# Altium PCB PCB1.PcbDoc
Units mil, origin at the board's own origin, x right, y up, seen from the top; angles counter-clockwise.
Board outline 3937.01 x 3937.01 mil, 2 copper layers (Top Layer, Bottom Layer); 122 components, 60 nets, 314 pads, 305 vias.
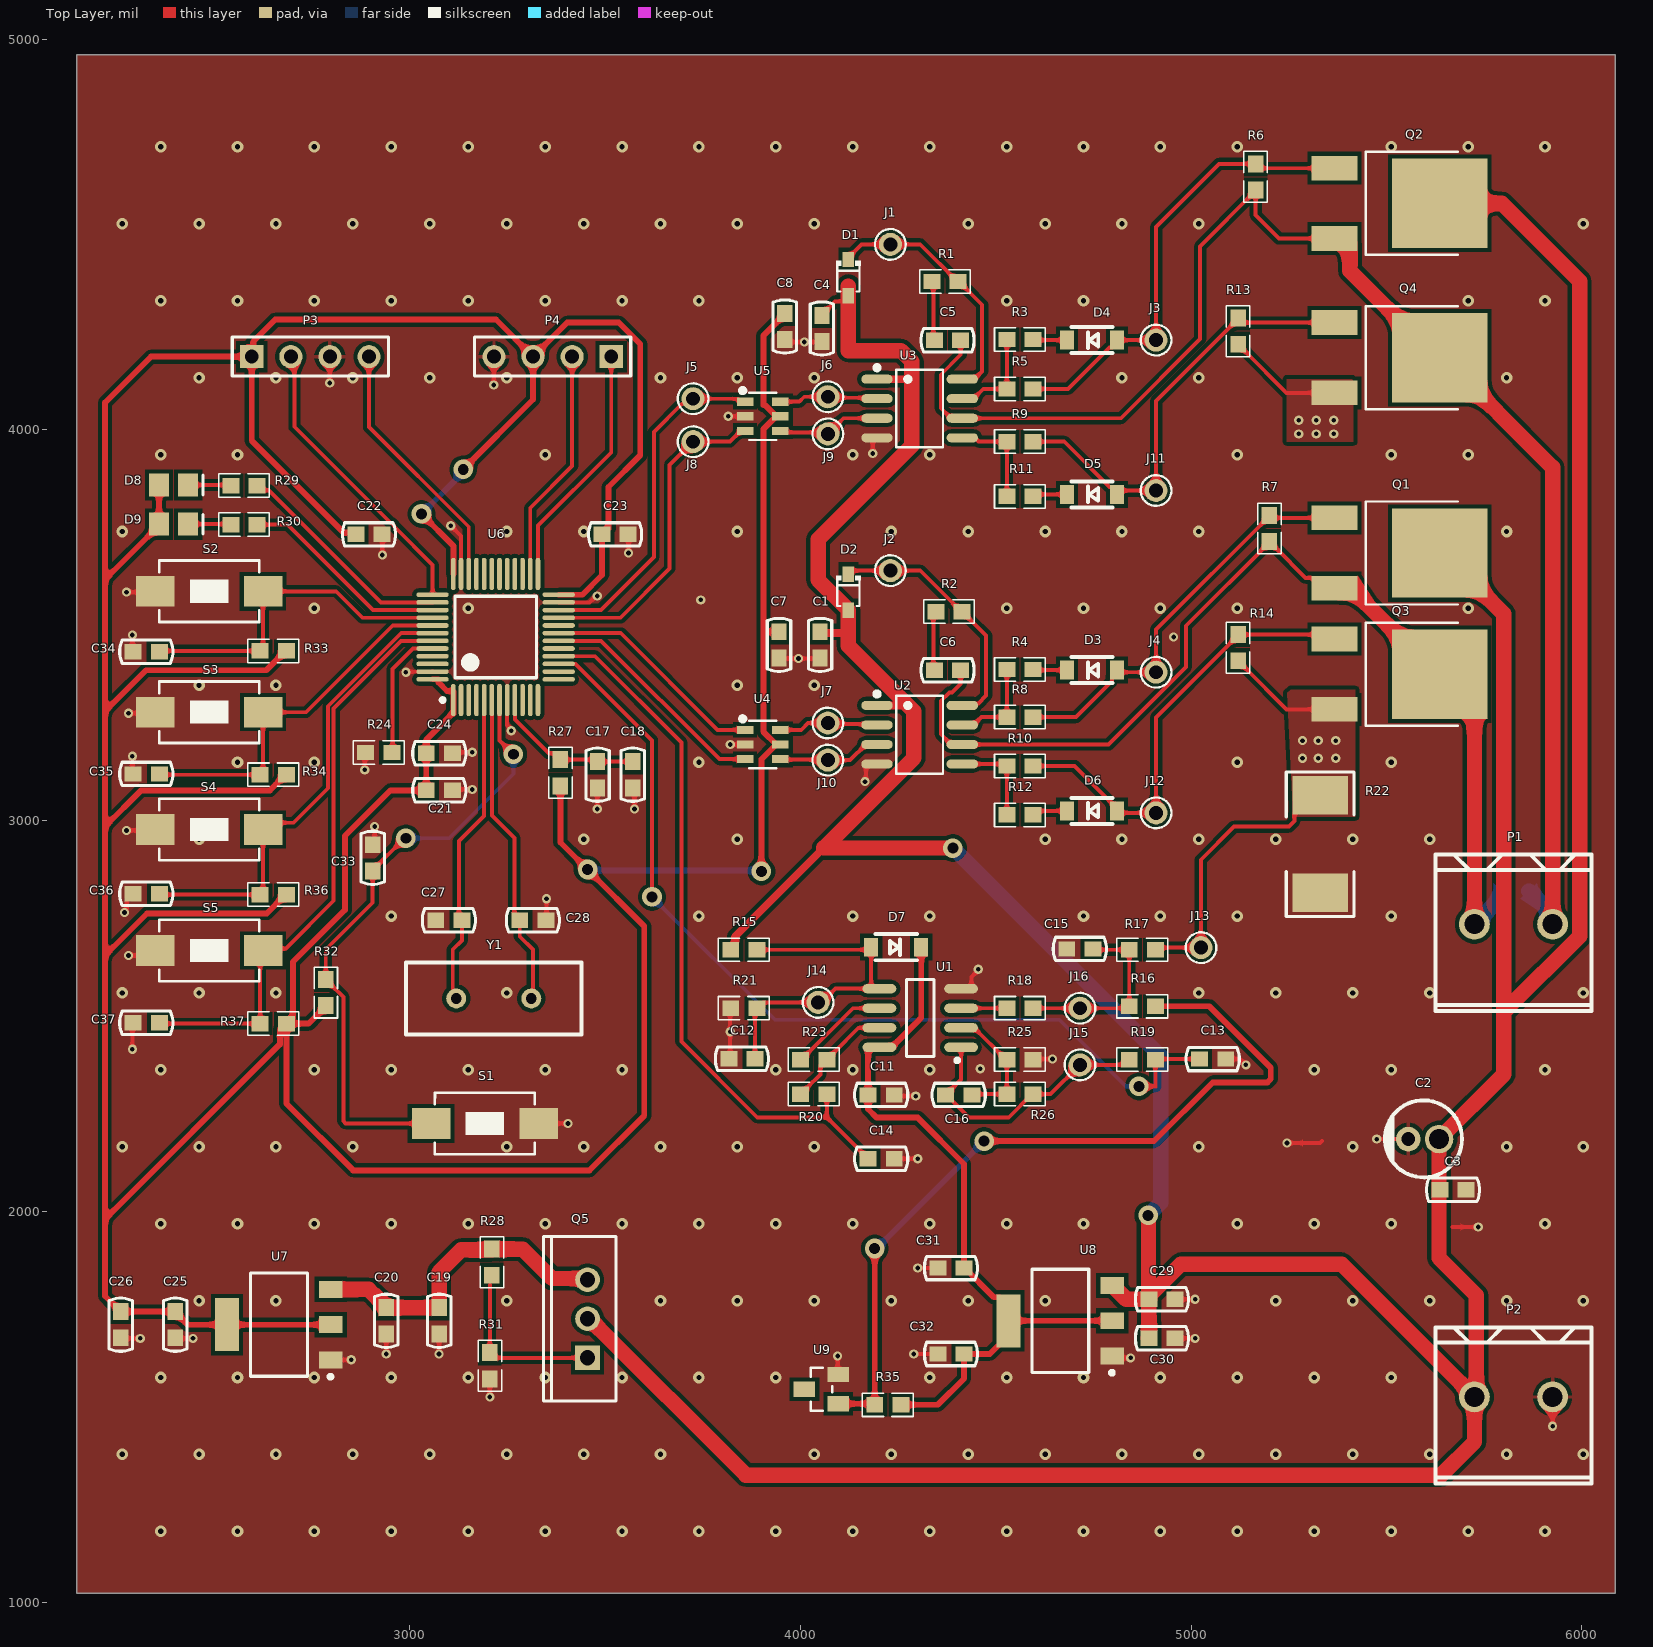
[diagram p0: Top Layer view]
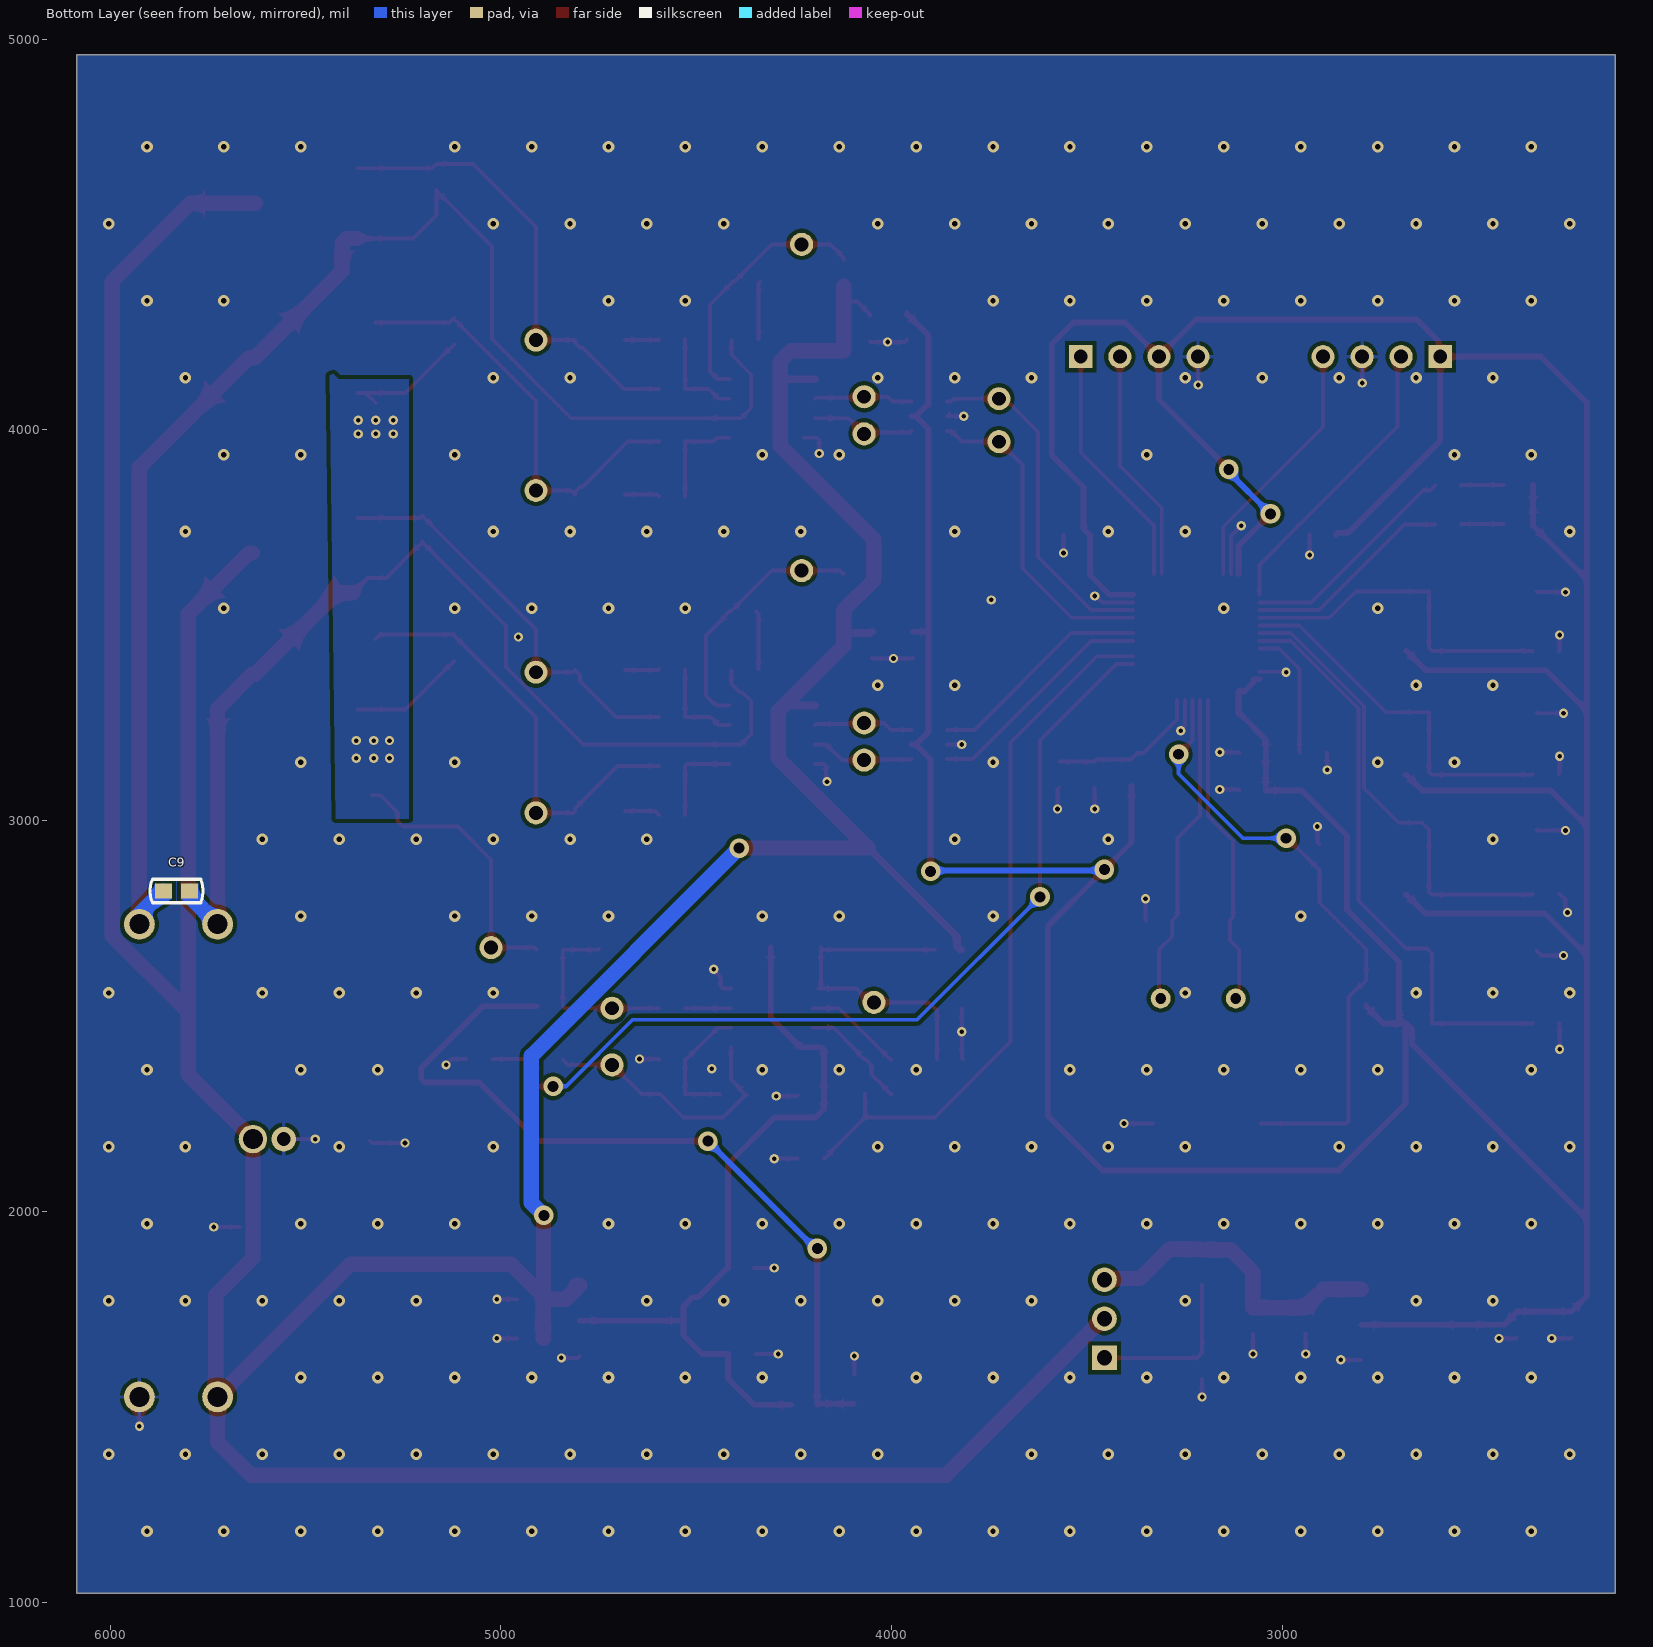
[diagram p1: Bottom Layer view, seen from below]

## Layer stack, top to bottom
Top Solder: solder mask 0.4, Solder Resist, Dk 3.5
Top Layer: signal copper 1.4
Dielectric 1: dielectric 12.6, FR-4, Dk 4.8
Bottom Layer: signal copper 1.4
Bottom Solder: solder mask 0.4, Solder Resist, Dk 3.5

## Board outline
2147.99,1022.99 2147.99,4960 6085,4960 6085,1022.99

## Design rules (kind name [scope] priority, off if disabled: settings)
Clearance [All] p1: gap=10 ignorepadtopadclearanceinfootprint=FALSE except(3.94: Arc-Arc Arc-Track Arc-SMDPad Track-Track Track-SMDPad SMDPad-SMDPad)
PolygonConnect [All] p1: thpad.connectstyle=Relief thpad.reliefconductorwidth=10 thpad.reliefentries=4 thpad.polygonreliefangle="90 Angle" thpad.airgapwidth=10 smdpad.connectstyle=Direct smdpad.reliefconductorwidth=10 smdpad.reliefentries=4 smdpad.polygonreliefangle="90 Angle" smdpad.airgapwidth=10 via.connectstyle=Direct via.reliefconductorwidth=10 via.reliefentries=4 via.polygonreliefangle="90 Angle" via.airgapwidth=10
RoutingVias [All] p1: holewidth=28 width=50 viastyle="Through Hole" minholewidth=11.81 minwidth=23.62 maxholewidth=28 maxwidth=50
SilkToSolderMaskClearance [IsPad] p1: minsilkscreentomaskgap=3.94 clearancetoexposedcopper=TRUE
SolderMaskExpansion [All] p1: expansion=4 istentingtop=FALSE
SupplyNets "Schematic Supply Nets_4" [InNet('VDD3.3V')] p1: voltage=0.000
SupplyNets "Schematic Supply Nets_3" [InNet('GND')] p2: voltage=0.000
SupplyNets "Schematic Supply Nets_2" [InNet('Vref 1.2V')] p3: voltage=0.000
SupplyNets "Schematic Supply Nets_1" [InNet('A3.3V')] p4: voltage=0.000
SupplyNets "Schematic Supply Nets" [InNet('12V')] p5: voltage=0.000
Width [All] p1: maxlimit=39.37 minlimit=10 preferedwidth=39.37
29 further rules are at their usual default settings.

## Components (designator, comment, footprint, x,y, rotation, side; value= is the part's Value field where it differs from the comment)
C1 "10uF" C-RAD-0603 4050,3450 r270 top
C2 "100uF" CAP-TH_BD5.0-P2.00-D0.5-FD-A 5595,2185 r180 top
C3 "100nF" C-RAD-0603 5670,2055 r180 top
C4 "10uF" C-RAD-0603 4055,4260 r270 top
C5 "100nF" C-RAD-0603 4376.54,4229.53 r180 top
C6 "100nF" C-RAD-0603 4376.54,3385 r180 top
C7 "100nF" C-RAD-0603 3945,3450 r270 top
C8 "100nF" C-RAD-0603 3960,4265 r270 top
C9 "100nF" C-RAD-0603 5830,2820 r0 bottom
C11 "100nF" C-RAD-0603 4206.54,2298.03 r0 top
C12 "100nF" C-RAD-0603 3850,2390.41 r180 top
C13 "1nF" C-RAD-0603 5055,2390 r0 top
C14 "1nF" C-RAD-0603 4206.54,2135 r0 top
C15 "1uF" C-RAD-0603 4715,2671.61 r0 top
C16 "100nF" C-RAD-0603 4405,2298.03 r0 top
C17 "10nF" C-RAD-0603 3480.61,3117.63 r90 top
C18 "1uF" C-RAD-0603 3570.61,3117.63 r90 top
C19 "10uF" C-RAD-0603 3075,1720 r90 top
C20 "100nF" C-RAD-0603 2940,1720 r90 top
C21 "100nF" C-RAD-0603 3075.61,3077.63 r180 top
C22 "100nF" C-RAD-0603 2895.61,3732.63 r180 top
C23 "100nF" C-RAD-0603 3525.61,3732.63 r180 top
C24 "10uF" C-RAD-0603 3075.61,3172.63 r180 top
C25 "10uF" C-RAD-0603 2400,1710 r90 top
C26 "100nF" C-RAD-0603 2260,1710 r90 top
C27 "16pF" C-RAD-0603 3100,2745 r0 top
C28 "16pF" C-RAD-0603 3315,2745 r180 top
C29 "10uF" C-RAD-0603 4925,1775 r180 top
C30 "100nF" C-RAD-0603 4925,1675 r180 top
C31 "10uF" C-RAD-0603 4385,1855 r0 top
C32 "100nF" C-RAD-0603 4385,1635 r0 top
C33 "100nF" C-RAD-0603 2905,2905 r270 top
C34 "100nF" C-RAD-0603 2325.61,3432.63 r0 top
C35 "100nF" C-RAD-0603 2325.61,3119.59 r0 top
C36 "100nF" C-RAD-0603 2325.61,2812.63 r0 top
C37 "100nF" C-RAD-0603 2325.61,2482.63 r0 top
D1 "1N4007WS" SOD-323_L1.8-W1.3-LS2.5-RD 4122.65,4390 r270 top
D2 "1N4007WS" SOD-323_L1.8-W1.3-LS2.5-RD 4122.65,3585 r270 top
D3 "1N5819W" SOD-123_L2.7-W1.6-LS3.7-R-RD 4746,3385.47 r0 top
D4 "1N5819W" SOD-123_L2.7-W1.6-LS3.7-R-RD 4746,4230 r0 top
D5 "1N5819W" SOD-123_L2.7-W1.6-LS3.7-R-RD 4746,3835 r0 top
D6 "1N5819W" SOD-123_L2.7-W1.6-LS3.7-R-RD 4746,3025 r0 top
D7 "1N4007" SOD-123_L2.7-W1.6-LS3.7-R-RD 4245,2676.14 r180 top
D8 "LED0" LED_0805 2395.61,3859.18 r0 top
D9 "LED0" LED_0805 2395.61,3759.18 r0 top
J1 "CHECK" CHECK-A 4230,4475 r0 top
J2 "CHECK" CHECK-A 4230,3640 r0 top
J3 "CHECK" CHECK-A 4910,4230 r0 top
J4 "CHECK" CHECK-A 4910,3380 r0 top
J5 "CHECK" CHECK-A 3725,4080 r0 top
J6 "CHECK" CHECK-A 4070,4085 r0 top
J7 "CHECK" CHECK-A 4070,3250 r0 top
J8 "CHECK" CHECK-A 3725,3970 r0 top
J9 "CHECK" CHECK-A 4070,3990 r0 top
J10 "CHECK" CHECK-A 4070,3155 r0 top
J11 "CHECK" CHECK-A 4910,3845 r0 top
J12 "CHECK" CHECK-A 4910,3020 r0 top
J13 "CHECK" CHECK-A 5025,2675 r0 top
J14 "CHECK" CHECK-A 4045,2535 r0 top
J15 "CHECK" CHECK-A 4715.29,2375 r0 top
J16 "CHECK" CHECK-A 4715.29,2520 r0 top
P1 "WJ500V-5.08-2P" CONN-TH_2P-P5.00_WJ500V-5.08-2P 5825,2735 r180 top
P2 "WJ500V-5.08-2P" CONN-TH_2P-P5.00_WJ500V-5.08-2P 5825,1525 r180 top
P3 "Header 4" HDR4X1_A 2595.61,4187.63 r0 top
P4 "Header 4" HDR4X1_A 3515.61,4187.63 r180 top
Q1 "NCE6020AK" TO-252-2_L6.6-W6.1-P4.57-LS10.1-TL-CW 5501.58,3685 r0 top
Q2 "NCE6020AK" TO-252-2_L6.6-W6.1-P4.57-LS10.1-TL-CW 5501.58,4580 r0 top
Q3 "NCE6020AK" TO-252-2_L6.6-W6.1-P4.57-LS10.1-TL-CW 5501.58,3375 r0 top
Q4 "NCE6020AK" TO-252-2_L6.6-W6.1-P4.57-LS10.1-TL-CW 5501.58,4185 r0 top
Q5 "MOSFET-P" TO-220AB 3455,1725 r90 top
R1 "10" 0603-1 4370,4380 r0 top
R2 "10" 0603-1 4380,3535 r180 top
R3 "10" 0603-1 4561.54,4231.5 r0 top
R4 "10" 0603-1 4561.54,3386.97 r0 top
R5 "10" 0603-1 4561.54,4105 r0 top
R6 "100k" 0603-1 5165,4647.78 r270 top
R7 "100k" 0603-1 5200,3747.78 r270 top
R8 "10" 0603-1 4561.54,3265 r0 top
R9 "10" 0603-1 4561.54,3970 r0 top
R10 "10" 0603-1 4561.54,3140 r0 top
R11 "10" 0603-1 4561.54,3830 r0 top
R12 "10" 0603-1 4561.54,3015 r0 top
R13 "100k" 0603-1 5120,4252.78 r270 top
R14 "100k" 0603-1 5120,3442.78 r270 top
R15 "30k" 0603-1 3855.06,2669.65 r0 top
R16 "20K" 0603-1 4875,2525 r180 top
R17 "1k" 0603-1 4875,2669.65 r0 top
R18 "1k" 0603-1 4561.54,2520 r0 top
R19 "10" 0603-1 4875,2388.44 r180 top
R20 "10" 0603-1 4033.93,2300 r180 top
R21 "10k" 0603-1 3855.06,2520 r180 top
R22 "10mR" 2512 5330,2940 r90 top
R23 "10k" 0603-1 4033.93,2388.44 r0 top
R24 "10k" 0603-1 2920.61,3174.59 r180 top
R25 "1k" 0603-1 4561.54,2388.44 r0 top
R26 "20K" 0603-1 4561.54,2300 r180 top
R27 "10" 0603-1 3385.61,3122.69 r270 top
R28 "1k" 0603-1 3210,1870 r90 top value=100k
R29 "1k" 0603-1 2575.61,3857.63 r180 top
R30 "1k" 0603-1 2575.61,3757.63 r180 top
R31 "1k" 0603-1 3205,1605 r90 top value=5k
R32 "10k" 0603-1 2785,2560 r270 top
R33 "10k" 0603-1 2650.61,3434.59 r0 top
R34 "10k" 0603-1 2650.61,3117.63 r0 top
R35 "10k" 0603-1 4223.46,1505 r0 top
R36 "10k" 0603-1 2650.61,2810.66 r0 top
R37 "10k" 0603-1 2650.61,2480.66 r0 top
S1 "SW-PB" SW_PB2_A1 3190,2225 r270 top
S2 "SW-PB" SW_PB2_A1 2488.82,3586.97 r90 top
S3 "SW-PB" SW_PB2_A1 2488.82,3277.63 r90 top
S4 "SW-PB" SW_PB2_A1 2488.82,2977.63 r90 top
S5 "SW-PB" SW_PB2_A1 2488.82,2667.63 r90 top
U1 "LMV358" NSO8_N 4306.61,2495 r180 top
U2 "XJNG2103" SOIC-8_L4.9-W3.9-P1.27-LS6.0-BL 4305,3220 r270 top
U3 "XJNG2103" SOIC-8_L4.9-W3.9-P1.27-LS6.0-BL 4305,4055 r270 top
U4 "SN74LVC2G17DBVR" SOT-23-6_L2.9-W1.6-P0.95-LS2.8-BL 3903.31,3195 r270 top
U5 "SN74LVC2G17DBVR" SOT-23-6_L2.9-W1.6-P0.95-LS2.8-BL 3903.31,4035 r270 top
U6 "STM32F103C" LQFP-48_M 3219.8,3470.09 r90 top
U7 "SPX1117M3-3.3" SOT-223 2665,1710 r90 top
U8 "SPX1117M3-3.3" SOT-223 4665,1720 r90 top
U9 "LM385M3-1.2/TR" SOT-23-3_L2.9-W1.3-P1.90-LS2.4-BR 4053.46,1545 r0 top
Y1 "XTAL" HC-49UX-TH_L11.4-W4.7-P4.88 3215,2545 r180 top value=4M

## Footprints (in the part's own frame and the unit in brackets; to place one, negate y for a bottom-side part, rotate by r counter-clockwise, add the part's x,y. Pads: shape width x height; smd on the part's side, far side on the other; paste and mask are expansions set on the pad)
0603-1 [mm] "贴片带丝印"
  rect 1.1x1 smd: 1(-0.85,0) 2(0.85,0)
  silkscreen extent -1.65,-0.76 1.65,0.76, body extent -1.14,-0.38 1.14,0.38, height 1
2512 [mm] "保险丝"
  rect 2.5x3.6 smd: 1(-3.175,0) 2(3.175,0)
  silkscreen extent -4.7,-2.2 4.7,2.2, body extent -3.17,-1.65 3.17,1.65, height 1.2
C-RAD-0603 [mm] "贴片电容"
  rect 1.1x1 smd: 1(-0.85,0) 2(0.85,0)
  silkscreen extent -1.73,-0.76 1.73,0.76, body extent -1.14,-0.38 1.14,0.38, height 1
CAP-TH_BD5.0-P2.00-D0.5-FD-A [mm]
  round 1.854 hole 1.3 paste-2539.97 mask+0.051: 1(-1,0)
  round 1.6 hole 0.9 paste-2539.97 mask+0.05: 2(1,0)
  silkscreen extent -2.49,-2.52 2.6,2.49
CHECK-A [mm] "Connector; Plug"
  round 1.5 hole 0.9: 1(0,0)
  silkscreen extent -1,-1 1,1
CONN-TH_2P-P5.00_WJ500V-5.08-2P [mm]
  round 2 hole 1.3 paste-2539.97 mask+0.051: 1(-2.54,0) 2(2.54,0)
  silkscreen extent -5.08,-4.52 5.08,5.64
HC-49UX-TH_L11.4-W4.7-P4.88 [mm]
  round 1.3 hole 0.7 paste-2539.97: 1(-2.44,0) 2(2.44,0)
  silkscreen extent -5.7,-2.35 5.7,2.35
HDR4X1_A [mm] "Connector; Header; 4 Position"
  rect 1.5x1.5 hole 0.9: 1(0,0)
  round 1.5 hole 0.9: 2(2.54,0) 3(5.08,0) 4(7.62,0)
  silkscreen extent -1.27,-1.27 8.89,1.27
LED_0805 [mm] "贴片二极管"
  rect 1.3x1.5 smd: 1(-0.95,0) 2(0.95,0)
  silkscreen extent 1.91,-0.64 1.91,0.64
LQFP-48_M [mm] "Thin QFP, 48-Leads, Body 7x7mm, Pitch 0.5mm, IPC Low Density"
  oval 2.1x0.3 smd: 1(-4.1,2.75) 2(-4.1,2.25) 3(-4.1,1.75) 4(-4.1,1.25) 5(-4.1,0.75) 6(-4.1,0.25) 7(-4.1,-0.25) 8(-4.1,-0.75) 9(-4.1,-1.25) 10(-4.1,-1.75) 11(-4.1,-2.25) 12(-4.1,-2.75) 25(4.1,-2.75) 26(4.1,-2.25) 27(4.1,-1.75) 28(4.1,-1.25) 29(4.1,-0.75) 30(4.1,-0.25) 31(4.1,0.25) 32(4.1,0.75) 33(4.1,1.25) 34(4.1,1.75) 35(4.1,2.25) 36(4.1,2.75)
  oval 0.3x2.1 smd: 13(-2.75,-4.1) 14(-2.25,-4.1) 15(-1.75,-4.1) 16(-1.25,-4.1) 17(-0.75,-4.1) 18(-0.25,-4.1) 19(0.25,-4.1) 20(0.75,-4.1) 21(1.25,-4.1) 22(1.75,-4.1) 23(2.25,-4.1) 24(2.75,-4.1) 37(2.75,4.1) 38(2.25,4.1) 39(1.75,4.1) 40(1.25,4.1) 41(0.75,4.1) 42(0.25,4.1) 43(-0.25,4.1) 44(-0.75,4.1) 45(-1.25,4.1) 46(-1.75,4.1) 47(-2.25,4.1) 48(-2.75,4.1)
  silkscreen extent -4.22,-2.65 2.65,3.57, body extent -3.5,-3.5 3.5,3.5, height 1.6
NSO8_N [mm] "SOIC-max660"
  oval 2.2x0.6 smd: 1(-2.654,1.905) 2(-2.654,0.635) 3(-2.654,-0.635) 4(-2.654,-1.905) 5(2.654,-1.905) 6(2.654,-0.635) 7(2.654,0.635) 8(2.654,1.905)
  silkscreen extent -2.53,-2.5 0.9,2.88, body extent -1.95,-2.45 1.95,2.45, height 1.75
SOD-123_L2.7-W1.6-LS3.7-R-RD [mil]
  rect 35.8x48 smd: 1(64,0) 2(-64,0)
  silkscreen extent -53,-33 53,33
SOD-323_L1.8-W1.3-LS2.5-RD [mm]
  rect 1x0.75 smd: 1(-1.173,0) 2(1.173,0)
  silkscreen extent -1.08,-0.8 0.9,0.8
SOIC-8_L4.9-W3.9-P1.27-LS6.0-BL [mm]
  oval 0.588x2.045 smd: 1(-1.905,-2.772) 2(-0.635,-2.772) 3(0.635,-2.772) 4(1.905,-2.772) 5(1.905,2.772) 6(0.635,2.772) 7(-0.635,2.772) 8(-1.905,2.772)
  silkscreen extent -2.8,-2.92 2.53,1.52
SOT-23-3_L2.9-W1.3-P1.90-LS2.4-BR [mm]
  rect 1.4x1 smd: 1(1.1,-0.95) 2(1.1,0.95) 3(-1.1,0)
  silkscreen extent -0.7,-1.4 0.7,1.4, body extent -1.27,-1.45 1.53,1.45, height 1.2
SOT-23-6_L2.9-W1.6-P0.95-LS2.8-BL [mil]
  rect 20.95x42.2 smd: 1(-37.4,-45.24) 2(0,-45.24) 3(37.4,-45.24) 4(37.4,45.24) 5(0,45.24) 6(-37.4,45.24)
  silkscreen extent -72,-57 61,35
SOT-223 [mm]
  rect 1.1x1.55 smd: 1(-2.3,-3.375) 2(0,-3.375) 3(2.3,-3.375)
  rect 3.45x1.55 smd: 4(0,3.375)
  silkscreen extent -3.5,-3.48 3.35,1.85, body extent -3.3,-3.94 3.3,3.43, height 0.8
SW_PB2_A1 [mm]
  rect 2x2.5 smd: 1(0,3.556) 2(0,-3.444)
  silkscreen extent -2,-3.19 2,3.31, body extent -2.03,-3.18 2.03,3.3, height 1.2
TO-220AB [mm] "TO, Thru-Hole, Vertical, Heatsink Mounted; 3 In-Line Leads; Pitch 2.54 mm"
  round 1.6 hole 1: D(0,0) S(2.54,0)
  rect 1.6x1.6 hole 1: G(-2.54,0)
  silkscreen extent -5.35,-1.85 5.35,2.85, body extent -5.33,-1.78 5.33,2.79, height 4
TO-252-2_L6.6-W6.1-P4.57-LS10.1-TL-CW [mm]
  rect 3x1.6 smd: 1(-3.424,2.285) 3(-3.424,-2.285)
  rect 6.2x5.8 smd: 2(3.424,0)
  silkscreen extent -1.38,-3.35 4.58,3.35

## Part data
C1 C3 C4 C5 C6 C7 C8 C9 C11 C12 C13 C14 C15 C16 C17 C18 C19 C20 C21 C22 C23 C24 C25 C26 C27 C28 C29 C30 C31 C32 C33 C34 C35 C36 C37: library part Cap, "无极性电容", LatestRevisionDate=17-Jul-2002, LatestRevisionNote="Re-released for DXP Platform.", PackageReference=RAD-0.3, Published=8-Jun-2000, Publisher="Altium Limited"
C2: library part Cap_1, "贴片和直插电解电容", Capacitance=47uF, Equivalent Series Resistance(ESR)=-, JLCPCB Part Class="Extended Part", LCSC Part Name="47uF ±20% 50V", Lifetime @ Temp=2000hrs@105℃, Manufacturer=KNSCHA(科尼盛), Manufacturer Part=RVT47UF50V67RV0029, Operating Temperature=-55℃~+105℃, Rated Voltage=50V, Ripple Current=66mA@120Hz, Tolerance=±20%, Add into BOM=yes, Convert to PCB=yes, Datasheet=https://atta.szlcsc.com/upload/public/pdf/source/20210824/3B61B08E802BEB202F31F6CC5BD6B8B5.pdf, Device=RVT47UF50V67RV0029, L=7.7mm, Name=100uF, Supplier=LCSC, Supplier Footprint=SMD,D6.3xL7.7mm, Supplier Part=C2887275, Symbol=RVT47UF50V67RV0029, φD=6.3mm
D1 D2: "二极管", JLCPCB Part Class="Extended Part", Manufacturer=MDD, Add into BOM=yes, Convert to PCB=yes, Datasheet=https://atta.szlcsc.com/upload/public/pdf/source/20180525/C193404_0C623596A90FA1D1FBDCFE625FBC3C97.pdf, Device=1N4007WS, LCSC Part Name=1N4007WS, Manufacturer Part=1N4007WS, Name=1N4007WS, Supplier=LCSC, Supplier Footprint=SOD-323, Supplier Part=C193404, Symbol=1N4007WS
D3 D4 D5 D6: "二极管", Average Rectified Current (Io)=350mA, Forward Voltage (Vf@If)=600mV@200mA, JLCPCB Part Class="Extended Part", LCSC Part Name="40V 350mA 600mV@200mA", Manufacturer=JSMSEMI(杰盛微), Reverse Leakage Current (Ir)=5uA@30V, Reverse Voltage (Vr)=40V, Add into BOM=yes, Convert to PCB=yes, Datasheet=https://atta.szlcsc.com/upload/public/pdf/source/20211201/C266112E93E924DFE0C071C9A8E85281.pdf, Device=1N5819W_C963381, Diode Configuration=独立式, Manufacturer Part=1N5819W, Name=1N5819W, Supplier=LCSC, Supplier Footprint=SOD-123, Supplier Part=C963381, Symbol=1N5819W_C963381
D7: library part 1N5819W, "二极管", Average Rectified Current (Io)=350mA, Forward Voltage (Vf@If)=600mV@200mA, JLCPCB Part Class="Extended Part", LCSC Part Name="40V 350mA 600mV@200mA", Manufacturer=JSMSEMI(杰盛微), Reverse Leakage Current (Ir)=5uA@30V, Reverse Voltage (Vr)=40V, Add into BOM=yes, Convert to PCB=yes, Datasheet=https://atta.szlcsc.com/upload/public/pdf/source/20211201/C266112E93E924DFE0C071C9A8E85281.pdf, Device=1N5819W_C963381, Diode Configuration=独立式, Manufacturer Part=1N5819W, Name=1N5819W, Supplier=LCSC, Supplier Footprint=SOD-123, Supplier Part=C963381, Symbol=1N5819W_C963381
D8 D9: "发光二极管", LatestRevisionDate=08-Jul-2005, LatestRevisionNote="Mech Layer 1 removed.", PackageReference=LED-0, Published=8-Jun-2000, Publisher="Altium Limited"
J1 J2 J3 J4 J5 J6 J7 J8 J9 J10 J11 J12 J13 J14 J15 J16: "测试点"
P1 P2: "接线端子", Color=绿色, Current Rating (Max)=18A, JLCPCB Part Class="Extended Part", LCSC Part Name="5.08mm 排数:1 每排P数:2 直针 可拼接", Manufacturer=KANGNEX(康奈克斯电气), Operating Temperature Range=-40℃~+105℃, Voltage Rating (Max)=250V, Add into BOM=yes, Convert to PCB=yes, Datasheet=https://atta.szlcsc.com/upload/public/pdf/source/20191225/C8465_02D34CE5B5B4A53DF5891601D97FA9F4.pdf, Device=WJ500V-5.08-2P, Manufacturer Part=WJ500V-5.08-2P, Mounting Style=直针, Name=WJ500V-5.08-2P, Number of PINs Per Row=2, Number of Rows=1, Pitch=5.08mm, Supplier=LCSC, Supplier Footprint=直插,P=5.08mm, Supplier Part=C8465, Symbol=WJ500V-5.08-2P-14-00A, Wire Gauge - AWG=14~30, Wire Gauge - mm?=2.5
P3 P4: "接插件", LatestRevisionDate=17-Jul-2002, LatestRevisionNote="Re-released for DXP Platform.", Publisher="Altium Limited"
Q1 Q2 Q3 Q4: "NMOS", Continuous Drain Current (Id)=20A, Drain Source On Resistance (RDS(on)@Vgs,Id)=35mΩ@10V,20A, Drain Source Voltage (Vdss)=60V, Gate Threshold Voltage (Vgs(th)@Id)=2.5V@250uA, JLCPCB Part Class="Extended Part", LCSC Part Name="N沟道 60V 20A", Manufacturer=NCE(无锡新洁能), Power Dissipation (Pd)=45W, Add into BOM=yes, Convert to PCB=yes, Datasheet=https://atta.szlcsc.com/upload/public/pdf/source/20170508/1494211006052.pdf, Device=NCE6020AK, Manufacturer Part=NCE6020AK, Name=NCE6020AK, Supplier=LCSC, Supplier Footprint=TO-252-2(DPAK), Supplier Part=C108639, Symbol=NCE6020AK, Type=N沟道
Q5: "P-Channel MOSFET", PackageDocument=1995/1996, LatestRevisionDate=17-Jul-2002, LatestRevisionNote="Re-released for DXP Platform.", PackageReference=E3, Published=8-Jun-2000, Publisher="Altium Limited"
R1 R2 R3 R4 R5 R6 R7 R8 R9 R10 R11 R12 R13 R14 R15 R16 R17 R18 R19 R20 R21 R22 R23 R24 R25 R26 R27 R28 R29 R30 R31 R32 R33 R34 R35 R36 R37: library part Res1, "贴片电阻", LatestRevisionDate=17-Jul-2002, LatestRevisionNote="Re-released for DXP Platform.", PackageReference=AXIAL-0.4, Published=8-Jun-2000, Publisher="Altium Limited"
S1 S2 S3 S4 S5: "微动开关", LatestRevisionDate=17-Jul-2002, LatestRevisionNote="Re-released for DXP Platform.", PackageReference=SPST-2, Published=24-Mar-1999, Publisher="Altium Limited"
U1: library part LM358, "双运放"
U2 U3: "MOS驱动", JLCPCB Part Class="Extended Part", LCSC Part Name="半桥 MOSFET", Manufacturer=NCE(无锡新洁能), Operating Temperature=-55℃~+150℃@(Tj), Peak Output Current(sink)=-, Supply Voltage=6V~20V, Add into BOM=yes, Convert to PCB=yes, Datasheet=https://atta.szlcsc.com/upload/public/pdf/source/20210824/2661D35F843708EC116D5340AB29615E.pdf, Device=XJNG2103, Driven Configuration=半桥, Fall Time=40ns, Feature=-, loadtype=MOSFET, Manufacturer Part=XJNG2103, Name=XJNG2103, Number of Drivers=2, Peak Output Current(source)=-, Propagation Delay tpHL=-, Propagation Delay tpLH=-, Rise Time=50ns, Supplier=LCSC, Supplier Footprint=SOIC-8, Supplier Part=C2887735, Symbol=XJNG2103, Whether the isolation=非隔离
U4 U5: "缓冲器", JLCPCB Part Class="Extended Part", Manufacturer=TI(德州仪器), Operating Temperature=-40℃~+125℃, Sink Current=32mA, Supply Voltage=1.65V~5.5V, Add into BOM=yes, Channel Type=-, Convert to PCB=yes, Datasheet=https://www.ti.com/cn/lit/gpn/sn74lvc2g17, Device=SN74LVC2G17DBVR, Input type=施密特触发器, LCSC Part Name=SN74LVC2G17DBVR, Logic Family=74LVC, Manufacturer Part=SN74LVC2G17DBVR, Name=SN74LVC2G17DBVR, Number of Bits per Element=1, Number of Elements=2, output type=推挽, Source Current=32mA, Supplier=LCSC, Supplier Footprint=SOT-23-6, Supplier Part=C10429, Symbol=SN74LVC2G17DBVR
U6: "STM32单片机48引脚"
U7 U8: "3.3V稳压芯片"
U9: JLCPCB Part Class="Extended Part", LCSC Part Name="1.2V 微功耗电压参考", Manufacturer=HGSEMI(华冠), Add into BOM=yes, Convert to PCB=yes, Datasheet=https://atta.szlcsc.com/upload/public/pdf/source/20200716/C507206_69C34F3D5BBAED8E3BE132CB46276FD0.pdf, Device=LM385M3-1.2/TR, Manufacturer Part=LM385M3-1.2/TR, Supplier=LCSC, Supplier Footprint=SOT-23-3, Supplier Part=C507206, Symbol=LM385M3-1.2/TR
Y1: "晶振", LatestRevisionDate=17-Jul-2002, LatestRevisionNote="Re-released for DXP Platform.", PackageReference=R38, Published=8-Jun-2000, Publisher="Altium Limited"

## Via types
v1: diameter 29.53, hole 13.78, Top Layer to Bottom Layer, tented both sides, 226 vias
v2: diameter 23.62, hole 12, Top Layer to Bottom Layer, 49 vias
v3: diameter 23.62, hole 11.81, Top Layer to Bottom Layer, 18 vias
v4: diameter 50, hole 28, Top Layer to Bottom Layer, 12 vias

## Nets (pads, with @x,y where several pads share a name; then routed paths per layer and width w, separated by ;. In a path a pad name is that pad's centre, name@x,y a point inside that pad or via, vN(x,y) a via of type N, cw(c..) or ccw(c..) an arc to the next point about the centre after c; other vN are vias at no path point)
12V: C1.1 C2.1 C3.2 C4.1 C29.2 C30.2 D1.2 D2.2 P2.2 Q1.2 Q2.2 Q5.D R15.1 U2.1 U3.1 U8.3 | length 12869
  Top Layer w10: C4.1 4055,4295.43 4088.72,4329.15 4112.89,4329.15 D1.2@4122.65,4338.91 ; D2.2@4107.97,3524.15 4112.89,3524.15 4122.65,3533.91 D2.2
  Top Layer w20: R15.1 3823.57,2669.65 3833.25,2679.33 3833.25,2703.94 4059.66,2930.34 ; C1.1 4053.46,3480 4122.65,3480 ; U2.1 4274.94,3295 ; U3.1 4285,4130
  Top Layer w39.37: Q5.D 3459.97,1725 3859.97,1325 5640,1325 5725,1410 P2.2 ; 4122.65,4368.31 4122.65,4338.91 4122.65,4203.2 4256.94,4203.2 4285,4175.13 4285,4130 4285,3960 4045,3720 4045,3616.49 D2.2 4122.65,3524.15 4122.65,3480 4122.65,3447.28 4274.97,3294.97 4290,3279.94 4290,3160.69 4059.66,2930.34 4060,2930 v4(4390,2930) ; U8.3 4806.73,1810.55 4808.7,1808.58 4808.7,1799.72 4833.42,1775 C29.2 ; C30.2@4889.57,1675 C30.2 C29.2 ; v4(4890,1990) 4890.77,1989.23 4890.77,1775 C29.2 ; C29.2@4893.5,1775 4893.5,1784.79 4973.71,1865 5385,1865 P2.2 ; Q2.2@5628.51,4580 Q2.2 5795,4580 5994.06,4380.94 5994.06,2704.06 5810,2520 5800,2520 ; Q1.2 5644.26,3685 5800,3529.26 5800,2520 ; P2.2 5730,1530 5730,1785 5634.37,1880.63 C2.1 5800,2350.63 5800,2520
  Bottom Layer w39.37: v4(4390,2930) 4921.83,2398.17 4921.83,2021.83 v4(4890,1990)
A3.3V: C11.1 C31.2 C32.2 D7.2 R35.2 U1.8 U8.2 U8.4 | length 1952.7
  Top Layer w15: R35.2 4351.5,1505 4418.46,1571.97 C32.2 4484.53,1635 4532.13,1682.6 U8.4 ; D7.2 4309,2495.38 4233.62,2420 U1.8 4179.36,2420 4173.07,2413.71 C11.1 4173.07,2261.93 4195,2240 4300,2240 4418.46,2121.54 C31.2 4420.43,1855 4495.02,1780.41 4509.11,1780.41 4532.13,1757.4 U8.4 ; U8.2 U8.4
ADC_CUR: C13.1 R19.1 U6.15 | length 2391.6
  Top Layer w10: U6.15 3381.56,3400.85 3424.15,3400.85 3620,3205 v4(3620,2805) ; v4(4866.23,2320) 4908.46,2320 R19.1 4910.02,2390 C13.1
  Bottom Layer w10: v4(3620,2805) 3934.53,2490.47 4662.79,2490.47 4833.26,2320 v4(4866.23,2320)
ADC_VOL: C14.1 R20.1 U6.16 | length 1833.1
  Top Layer w10: U6.16 3474.12,3420.88 3695,3200 3695,2435 3889.33,2240.67 4067.4,2240.67 ; R20.1 4067.4,2240.67 ; C14.1 4171.1,2135 4156.42,2149.69 4156.42,2151.65 4067.4,2240.67
CLK: P4.2 U6.26 | length 600.5
  Top Layer w10: U6.26 3308.38,3800.4 3415.61,3907.63 P4.2
GND: C1.2 C2.2 C3.1 C4.2 C7.2 C8.2 C11.2 C12.2 C13.2 C14.2 C15.1 C17.1 C18.1 C19.1 C20.1 C21.1 C22.1 C23.1 C24.1 C25.1 C26.1 C27.1 C28.1 C29.1 C30.1 C31.1 C32.1 C33.1 C34.1 C35.1 C36.1 C37.1 P2.1 P3.3 P4.4 R21.2 R22.1 R24.2 R25.2 R31.1 S1.1 S2.1 S3.1 S4.1 S5.1 U1.4 U2.4 U3.4 U4.2 U5.2 U6.8 U6.23 U6.35 U6.47 U7.1 U8.1 U9.2 | length 3379.7
  Top Layer w10: C26.1 2261.54,1675 v2(2310,1675) ; v2(2270,2765) 2270,2768.69 2275.49,2774.17 2275.49,2797.94 2290.17,2812.63 C36.1 ; v2(2275,2975) 2346.19,2975 S4.1 ; v2(2275,3585) 2346.85,3585 S2.1 ; v2(2280,2655) 2336.19,2655 S5.1 ; v2(2280,3275) 2346.19,3275 S3.1 ; v3(2290,2415) 2290,2480.48 C37.1 ; v2(2290,3165) 2290,3121.74 C35.1 ; v2(2290,3475) 2290,3434.77 C34.1 ; C25.1 2401.54,1675 v2(2445,1675) ; v2(2795,4120) 2795.3,4120.3 2795.3,4187.32 P3.3 ; U7.1 2798.43,1620 v2(2850,1620) ; v2(2885,3130) 2885,3172.45 R24.2 ; C33.1 2910,2943.46 v2(2910,2985) ; C22.1 2930,3731.7 v3(2930,3680) ; v2(2940,1635) C20.1 ; v2(2990,3380) 2991.17,3381.17 3058.03,3381.17 U6.47 ; v2(3075,1635) C19.1 ; v2(3105,3755) 3131.21,3728.79 U6.35 ; C21.1 3111.44,3080 v2(3160,3080) ; C24.1 3111.44,3175 v2(3160,3175) ; v2(3205,1525) R31.1 ; v2(3215,4115) 3215.3,4115.3 3215.3,4187.32 P4.4 ; U6.8 3249.32,3244.36 3260,3233.69 v2(3260,3230) ; S1.1 v3(3405,2225) ; C28.1 3350,2746.54 v2(3350,2800) ; U6.23 3459.99,3558.68 3476.31,3575 v2(3480,3575) ; v2(3480,3030) 3480,3083.56 C17.1 ; C23.1 3560,3731.7 v2(3560,3685) ; C18.1 3575,3079.77 v2(3575,3030) ; v2(3815,4035) U5.2 U5.2@3852.6,4040.47 ; C12.2 3820,2393.87 v2(3820,2460) 3820,2518.4 R21.2 ; v2(3820,3195) U4.2 ; C7.2 3946.54,3415 v2(3995,3415) 4048.46,3415 C1.2 ; C8.2 3966.54,4225 v2(4010,4225) 4053.46,4225 C4.2 ; v2(4095,1630) 4095,1584.17 U9.2 ; v2(4165,3100) 4167.61,3102.61 4167.61,3138.93 4173.68,3145 U2.4 ; v2(4185,3940) 4185,3973.93 4191.07,3980 U3.4 U3.4@4224.53,3980 ; C14.2 v2(4300,2135) ; C11.2 4243.03,2295 v2(4295,2295) ; v2(4290,1635) C32.1@4346.54,1635 ; v2(4300,1855) C31.1 ; U1.4 4431.3,2570 4437.6,2576.29 4437.6,2599.49 4455,2616.9 v2(4455,2620) ; R25.2 4596.56,2390 v2(4645,2390) ; U8.1 4802.32,1625 v2(4845,1625) ; C30.1 v2(5010,1675) ; C29.1 v2(5010,1775) ; C13.2 5125,2390 v2(5140,2375) ; v2(5245,2175) 5330,2175 5335,2180 ; v2(5475,2185) C2.2 ; 5668.46,1960 v2(5735,1960) ; v2(5925,1450) P2.1
  other v1: 2362.2,1181.1 2559.06,1181.1 2755.91,1181.1 2952.76,1181.1 3149.61,1181.1 3346.46,1181.1 3543.31,1181.1 3740.16,1181.1 3937.01,1181.1 4133.86,1181.1 4330.71,1181.1 4527.56,1181.1 4724.41,1181.1 4921.26,1181.1 5118.11,1181.1 5314.96,1181.1 5511.81,1181.1 5708.66,1181.1 5905.51,1181.1 2263.78,1377.95 2460.63,1377.95 2657.48,1377.95 2854.33,1377.95 3051.18,1377.95 3248.03,1377.95 3444.88,1377.95 3641.73,1377.95 4035.43,1377.95 4232.28,1377.95 4429.13,1377.95 4625.98,1377.95 4822.83,1377.95 5019.69,1377.95 5216.54,1377.95 5413.39,1377.95 5610.24,1377.95 5807.09,1377.95 6003.94,1377.95 2362.2,1574.8 2559.06,1574.8 2755.91,1574.8 2952.76,1574.8 3149.61,1574.8 3346.46,1574.8 3543.31,1574.8 3740.16,1574.8 3937.01,1574.8 4330.71,1574.8 4527.56,1574.8 4724.41,1574.8 4921.26,1574.8 5118.11,1574.8 5314.96,1574.8 5511.81,1574.8 2460.63,1771.65 2657.48,1771.65 3248.03,1771.65 3641.73,1771.65 3838.58,1771.65 4035.43,1771.65 4232.28,1771.65 4429.13,1771.65 4625.98,1771.65 5216.54,1771.65 5413.39,1771.65 5610.24,1771.65 5807.09,1771.65 6003.94,1771.65 2362.2,1968.5 2559.06,1968.5 2755.91,1968.5 2952.76,1968.5 3149.61,1968.5 3346.46,1968.5 3543.31,1968.5 3740.16,1968.5 3937.01,1968.5 4133.86,1968.5 4330.71,1968.5 4527.56,1968.5 4724.41,1968.5 5118.11,1968.5 5314.96,1968.5 5511.81,1968.5 5905.51,1968.5 2263.78,2165.35 2460.63,2165.35 2657.48,2165.35 2854.33,2165.35 3248.03,2165.35 3444.88,2165.35 3641.73,2165.35 3838.58,2165.35 4035.43,2165.35 5019.69,2165.35 5413.39,2165.35 5807.09,2165.35 6003.94,2165.35 2362.2,2362.2 2755.91,2362.2 2952.76,2362.2 3149.61,2362.2 3346.46,2362.2 3543.31,2362.2 3937.01,2362.2 4133.86,2362.2 4330.71,2362.2 5314.96,2362.2 5511.81,2362.2 5905.51,2362.2 2263.78,2559.06 2460.63,2559.06 2657.48,2559.06 3248.03,2559.06 5019.69,2559.06 5216.54,2559.06 5413.39,2559.06 5610.24,2559.06 6003.94,2559.06 2952.76,2755.91 3740.16,2755.91 4133.86,2755.91 4330.71,2755.91 4724.41,2755.91 4921.26,2755.91 5118.11,2755.91 5511.81,2755.91 2460.63,2952.76 3444.88,2952.76 3838.58,2952.76 4625.98,2952.76 4822.83,2952.76 5019.69,2952.76 5216.54,2952.76 5413.39,2952.76 5610.24,2952.76 2559.06,3149.61 2755.91,3149.61 3740.16,3149.61 5118.11,3149.61 5511.81,3149.61 2460.63,3346.46 2657.48,3346.46 3838.58,3346.46 4035.43,3346.46 2755.91,3543.31 3149.61,3543.31 4527.56,3543.31 4724.41,3543.31 4921.26,3543.31 5118.11,3543.31 5708.66,3543.31 2263.78,3740.16 3248.03,3740.16 3444.88,3740.16 3838.58,3740.16 4232.28,3740.16 4429.13,3740.16 4625.98,3740.16 4822.83,3740.16 5019.69,3740.16 5807.09,3740.16 2362.2,3937.01 2559.06,3937.01 3346.46,3937.01 4133.86,3937.01 4330.71,3937.01 5118.11,3937.01 5511.81,3937.01 5708.66,3937.01 2460.63,4133.86 2657.48,4133.86 2854.33,4133.86 3051.18,4133.86 3248.03,4133.86 3641.73,4133.86 3838.58,4133.86 4035.43,4133.86 4822.83,4133.86 5019.69,4133.86 5807.09,4133.86 2362.2,4330.71 2559.06,4330.71 2755.91,4330.71 2952.76,4330.71 3149.61,4330.71 3346.46,4330.71 3543.31,4330.71 3740.16,4330.71 4527.56,4330.71 4724.41,4330.71 5708.66,4330.71 5905.51,4330.71 2263.78,4527.56 2460.63,4527.56 2657.48,4527.56 2854.33,4527.56 3051.18,4527.56 3248.03,4527.56 3444.88,4527.56 3641.73,4527.56 3838.58,4527.56 4035.43,4527.56 4429.13,4527.56 4625.98,4527.56 4822.83,4527.56 5019.69,4527.56 6003.94,4527.56 2362.2,4724.41 2559.06,4724.41 2755.91,4724.41 2952.76,4724.41 3149.61,4724.41 3346.46,4724.41 3543.31,4724.41 3740.16,4724.41 3937.01,4724.41 4133.86,4724.41 4330.71,4724.41 4527.56,4724.41 4724.41,4724.41 4921.26,4724.41 5118.11,4724.41 5511.81,4724.41 5708.66,4724.41 5905.51,4724.41
  other v3: 4460,2365 4955,3470 3745,3565
LED1: R29.1 U6.38 | length 573.1
  Top Layer w10: R29.1 2621.2,3845.5 2639.5,3845.5 2926.32,3558.68 U6.38
LED2: R30.1 U6.39 | length 539.9
  Top Layer w10: R30.1 2687.37,3757.63 2906.01,3538.99 U6.39
NetC5_1: C5.1 C9.2 P1.1 Q2.3 Q4.2 R6.2 U3.6 | length 3862.7
  Top Layer w10: C5.1 4410,4192.47 4358.89,4141.36 4358.89,4056.57 4385.47,4030 U3.6 4820.32,4030 5022.66,4232.34 5022.66,4470 5165,4612.34 R6.2 5165,4550 5224.96,4490.04 Q2.3 5392.03,4490.04 Q2.3@5418.53,4463.54
  Top Layer w39.37: Q2.3 5394.35,4490.04 5406.16,4478.23 5406.16,4407.36 5628.51,4185 Q4.2 ; Q4.2@5644.26,4185 5925,3904.26 P1.1
  Bottom Layer w39.37: C9.2 5865.43,2820 5917.47,2767.97 5917.47,2742.53 P1.1
NetC5_2: C5.2 R1.1 | length 148.8
  Top Layer w10: R1.1 4340,4376.54 C5.2@4340,4232.6
NetC6_1: C6.1 C9.1 P1.2 Q1.3 Q3.2 R7.2 U2.6 | length 2685.3
  Top Layer w10: C6.1 4410,3350.31 4387.85,3328.16 4381.05,3328.16 4358.89,3306.01 4358.89,3221.57 4385.47,3195 U2.6 4787.97,3195 4986.64,3393.67 4986.64,3498.99 R7.2@5200,3712.34 ; R7.2 R7.2@5200,3712.34 ; Q1.3@5378.6,3583.23 5340.29,3621.54 5292.77,3621.54 5216.65,3697.66 5214.69,3697.66 R7.2@5200,3712.34
  Top Layer w39.37: Q1.3@5378.6,3583.23 5420.28,3583.23 5628.51,3375 Q3.2 5725,3286.39 P1.2
  Bottom Layer w39.37: P1.2 5725,2735.06 5794.57,2804.63 C9.1@5794.57,2820
NetC6_2: C6.2 R2.2 | length 149.6
  Top Layer w10: C6.2@4340,3388.07 4340,3528.46 R2.2
NetC12_1: C12.1 D7.1 J14.1 R15.2 R21.1 U1.5 | length 849.3
  Top Layer w10: C12.1 3883.46,2514.94 R21.1 ; R15.2 4174.5,2669.65 D7.1 4181,2576.29 U1.5@4184.61,2572.69 ; R21.1@3890.5,2520 3905.5,2535 4055,2535 4090,2570 U1.5@4187.29,2570
NetC15_2: C15.2 J16.1 R16.2 R17.1 R18.2 | length 487.1
  Top Layer w10: R18.2 J16.1 4836.54,2520 R16.2 R17.1 4750.43,2669.65 C15.2
NetC16_1: C16.1 J15.1 R19.2 R26.1 U1.1 | length 693.1
  Top Layer w10: C16.1 C16.1@4373.5,2298.03 ; U1.1 4411.1,2337.59 4388.19,2314.69 4388.19,2312.72 C16.1@4373.5,2298.03 ; R19.2 4828.09,2375 J15.1 4640.29,2300 R26.1 4593.03,2300 4533.03,2240 4431.54,2240 C16.1@4373.5,2298.03
NetC16_2: C16.2 R25.1 R26.2 U1.2 | length 327.6
  Top Layer w10: U1.2 4444.54,2470 R25.1@4526.1,2388.44 ; C16.2 4440.43,2300 R26.2 R25.1
NetC17_2: C17.2 C18.2 R27.1 U6.9 | length 397.2
  Top Layer w10: U6.9 3269.35,3308.33 3269.35,3258.56 3355.11,3172.81 3370.92,3172.81 3385.61,3158.12 R27.1 3475.54,3156.15 C17.2 C18.2
NetC19_2: C19.2 C20.2 Q5.S R28.2 U7.3 | length 825.2
  Top Layer w39.37: U7.3 2894.88,1800.55 2940,1755.43 C20.2 C19.2 3075,1845 3131.5,1901.5 R28.2@3210,1901.5 ; R28.2 3289.09,1903.46 3364.45,1828.1 3451.9,1828.1 Q5.S
NetD1_1: D1.1 J1.1 R1.2 U3.8 | length 652.9
  Top Layer w10: D1.1 4122.65,4441.09 4156.57,4475 4306.5,4475 4401.5,4380 R1.2 ; R1.2@4405.43,4380 4465,4320.43 4465,4150 4445,4130 U3.8
NetD2_1: D2.1 J2.1 R2.1 U2.8 | length 648.8
  Top Layer w10: D2.1 4131.49,3640 J2.1 4306.5,3640 4411.5,3535 R2.1 ; U2.8 4446.39,3295 4451.6,3300.21 4455.21,3300.21 4475,3320 4475,3473.46 4430.12,3518.35 4430.12,3520.31 R2.1@4415.43,3535
NetD3_1: D3.1 J4.1 Q1.1 R7.1 R8.2 | length 1067
  Top Layer w10: R8.2 4705,3265 4797.1,3357.1 4797.1,3372.57 D3.1 4815.47,3380 J4.1 4910,3489.27 5200,3779.27 R7.1 5206.28,3774.96 Q1.1
NetD3_2: D3.2 R4.2 | length 87.6
  Top Layer w10: R4.2 4596.5,3385.47 D3.2
NetD4_1: D4.1 J3.1 Q2.1 R5.2 R6.1 | length 1188.6
  Top Layer w10: R5.2 4685,4105 4791,4211 4797.1,4211 4810,4223.9 D4.1 J3.1 4910,4520 5071.24,4681.24 R6.1 5176.28,4669.96 Q2.1
NetD4_2: D4.2 R3.2 | length 87.6
  Top Layer w10: R3.2 4596.5,4230 D4.2
NetD5_1: D5.1 J11.1 Q4.1 R9.2 R13.1 | length 1111.7
  Top Layer w10: R9.2 4675,3970 4791,3854 4797.1,3854 4810,3841.1 D5.1 4820,3845 J11.1 4910,4074.27 5120,4284.27 R13.1 5131.28,4274.96 Q4.1@5320.2,4274.96
NetD5_2: D5.2 R11.2 | length 89.1
  Top Layer w10: R11.2 4600,3835 D5.2
NetD6_1: D6.1 J12.1 Q3.1 R10.2 R14.1 | length 1116.4
  Top Layer w10: R10.2 4701.1,3140 4810,3031.1 D6.1 4815,3020 J12.1 4910,3264.27 5120,3474.27 R14.1 5308.93,3476.24 Q3.1@5320.2,3464.96
NetD6_2: D6.2 R12.2 | length 91.1
  Top Layer w10: R12.2 4605,3025 D6.2
NetD8_2: D8.2 R29.2 | length 109.8
  Top Layer w10: D8.2 2540.58,3859.18 R29.2
NetD9_2: D9.2 R30.2 | length 109.8
  Top Layer w10: D9.2 2540.58,3759.18 R30.2
NetJ6_1: J6.1 U3.2 U5.6 | length 254.6
  Top Layer w10: U5.6 3996.96,4072.4 4009.56,4085 J6.1 4072.5,4082.5 4193.35,4082.5 U3.2
NetJ7_1: J7.1 U2.2 U4.6 | length 256.7
  Top Layer w10: U4.6 4001.89,3232.4 4019.49,3250 J7.1 4072.5,3247.5 4193.35,3247.5 U2.2
NetJ9_1: J9.1 U3.3 U5.4 | length 267
  Top Layer w10: U5.4 3952.35,3993.8 4066.2,3993.8 J9.1 4110,4030 U3.3
NetJ10_1: J10.1 U2.3 U4.4 | length 264.9
  Top Layer w10: U4.4 3949.85,3156.3 4068.7,3156.3 J10.1 4127.17,3155 4167.17,3195 U2.3
NetJ13_1: J13.1 Q3.3 Q4.3 R13.2 R14.2 R17.2 R22.2 | length 1386.4
  Top Layer w10: R17.2 4913.82,2675 J13.1 5025,2900 5110,2985 5250,2985 5264.13,2999.13 5264.13,3020.79 5308.35,3065 R22.2 ; R14.2 5120,3407.34 5134.69,3392.66 5136.65,3392.66 5244.27,3285.04 Q3.3 ; R13.2 5120,4217.34 5134.69,4202.66 5136.65,4202.66 5244.27,4095.04 Q4.3 5346.5,4095.04 Q4.3@5320,4068.54
  other v3: 5285,3160 5325,3160 5370,3160 5285,3205 5325,3205 5370,3205 5275,3990 5320,3990 5365,3990 5275,4025 5320,4025 5365,4025
NetQ5_G: Q5.G R28.1 R31.2 | length 428.6
  Top Layer w10: 3205,1811.54 R31.2 3218.46,1625 Q5.G
NetR3_1: R3.1 R5.1 U3.7 | length 250.8
  Top Layer w10: U3.7 4442.83,4080 4467.83,4105 R5.1 R3.1
NetR4_1: R4.1 R8.1 U2.7 | length 244.2
  Top Layer w10: U2.7 4442.83,3245 4462.83,3265 R8.1 R4.1
NetR9_1: R9.1 R11.1 U3.5 | length 258.1
  Top Layer w10: U3.5 4446.39,3980 4456.39,3970 R9.1 R11.1
NetR10_1: R10.1 R12.1 U2.5 | length 241
  Top Layer w10: U2.5 4523.07,3145 R10.1 R12.1
NetR18_1: R18.1 U1.3 | length 117
  Top Layer w10: U1.3 R18.1
NetR20_2: R20.2 R23.2 U1.7 | length 286.2
  Top Layer w10: R20.2 4002.44,2300 4017.12,2314.69 4017.12,2316.65 4050.74,2350.28 4050.74,2373.76 4065.43,2388.44 R23.2 ; R23.2@4069.36,2388.44 4084.05,2403.13 4084.05,2405.09 4148.96,2470 U1.7
NetR23_1: R23.1 U1.6 | length 256.1
  Top Layer w10: R23.1 4002.44,2388.44 4133.99,2520 U1.6
NetR24_1: R24.1 U6.44 | length 338.4
  Top Layer w10: R24.1 2956.04,3176.56 2956.04,3388.06 3008.2,3440.22 3058.03,3440.22 U6.44
NRST: C33.2 R32.1 S1.2 U6.7 | length 1602.4
  Top Layer w10: C33.2 2905,2790 2785,2670 2785,2591.5 2799.69,2576.81 2801.65,2576.81 2830,2548.46 2830,2230.86 2835.86,2225 S1.2 ; C33.2@2905,2873.5 2986.5,2955 v4(2990,2955) ; U6.7 3229.64,3205.36 v4(3265,3170)
  Bottom Layer w10: v4(2990,2955) 3100,2955 3265,3120 v4(3265,3170)
PB0: U4.3 U6.18 | length 602.2
  Top Layer w10: U6.18 3489.75,3460.25 3792.4,3157.6 U4.3
PB1: U4.1 U6.19 | length 579.4
  Top Layer w10: U6.19 3540.06,3479.94 3787.6,3232.4 U4.1
PB4: C34.2 R33.1 S2.2 U6.40 | length 876.3
  Top Layer w10: C34.2 2361.04,3434.59 R33.1 2624.41,3441.86 S2.2 2811.71,3586.97 2879.37,3519.31 U6.40
PB5: C35.2 R34.1 S3.2 U6.41 | length 947.8
  Top Layer w10: C35.2 2361.04,3117.63 R34.1 2624.41,3124.89 S3.2 2734.54,3277.63 2956.54,3499.62 U6.41
PB6: C36.2 R36.1 S4.2 U6.42 | length 1193.7
  Top Layer w10: C36.2 2361.04,2810.66 R36.1 2624.41,2817.93 S4.2 2641.57,2994.78 2702.76,2994.78 2791.06,3083.08 2791.06,3292.79 2978.2,3479.94 U6.42
PB7: C37.2 R37.1 S5.2 U6.43 | length 1499.4
  Top Layer w10: C37.2 2361.04,2480.66 R37.1 2617.14,2660.36 2629.55,2672.76 2682.76,2672.76 2805,2795 2805,3287.02 2977.89,3459.91 3058.03,3459.91 U6.43
PB10: J8.1 U5.3 U6.21 | length 830.2
  Top Layer w10: U6.21 3539.31,3519.31 3665,3645 3665,3910 J8.1 3819.84,3970 3847.44,3997.6 U5.3
PB11: J5.1 U5.1 U6.22 | length 891.5
  Top Layer w10: U6.22 3381.56,3539.34 3489.34,3539.34 3625,3675 3625,3995 3696.01,4066.01 3697.74,4066.01 3711.73,4080 3839.84,4080 3847.44,4072.4 U5.1
SDA: P4.1 U6.25 | length 633.8
  Top Layer w10: U6.25 3328.06,3755.08 3515.61,3942.63 P4.1
SWCLK: P3.2 U6.37 | length 761
  Top Layer w10: P3.2 2704.99,4178.24 2704.99,4008.24 2951.98,3761.25 2954.43,3761.25 2959.66,3756.01 2959.66,3753.57 3058.38,3654.85 U6.37
SWDIO: P3.4 U6.34 | length 661.9
  Top Layer w10: P3.4 2895.61,4007.63 3150.9,3752.33 U6.34
VDD3.3V: C7.1 C8.1 C21.2 C22.2 C23.2 C24.2 C25.2 C26.2 D8.1 D9.1 P3.1 P4.3 R27.2 R32.2 R33.2 R34.2 R36.2 R37.2 U4.5 U5.5 U6.1 U6.24 U6.36 U6.48 U7.2 U7.4 | length 14555
  Top Layer w15: D8.1 D9.1 2358.2,3755.25 2220,3617.04 ; P3.1@2578.11,4205.13 2585.13,4212.15 2599.28,4212.15 2599.28,4226.3 2655.61,4282.63 3220.61,4282.63 P4.3 ; R37.2@2682.1,2480.66 2667.42,2465.97 2667.42,2427.42 2220,1980 ; R33.2@2682.1,3434.59 2632.51,3385 2325,3385 2220,3280 ; R36.2 2682.1,2810.66 2634.07,2762.63 2327.63,2762.63 2220,2655 ; R34.2 2682.1,3117.63 2642.1,3077.63 2312.63,3077.63 2220,2985 ; R37.2@2693.38,2488 2700.72,2495.34 2700.72,2638.03 2833.94,2771.25 2833.94,2960.96 2950.61,3077.63 C21.2 C24.2 3042.14,3207.31 3107.73,3272.9 3110.69,3272.9 3111.53,3273.73 U6.1 3111.53,3330.99 3110.69,3331.82 3095.53,3331.82 3073.81,3353.54 3073.81,3360.99 3072.97,3361.83 U6.48 ; R32.2 2785,2524.57 2741.09,2480.66 R37.2 2684.07,2275.93 2855,2105 3460,2105 3600,2245 3600,2730 v4(3455,2875) 3385.61,2944.39 R27.2 ; U7.2 U7.4 2431.5,1710 2400,1741.5 C25.2 C26.2 2220,1783.46 2220,1980 ; C22.2 2857.88,3736.89 2831.35,3736.89 2595.61,3972.63 P3.1 2337.63,4187.63 2220,4070 2220,3617.04 ; v4(3030,3785) 3111.53,3703.47 U6.36 ; v4(3136.85,3899.09) 3315.61,4077.85 P4.3 ; U6.24 3441.91,3578.36 3492.14,3628.59 C23.2 3494.11,3732.63 3508.8,3747.31 3508.8,3853.8 3590,3935 3590,4220 3535,4275 3402.98,4275 P4.3 ; v4(3900,2870) 3900,3157.08 U4.5@3937.92,3195 ; C7.1 3906.54,3483.46 3905,3485 ; U4.5 U4.5@3937.92,3195 ; U5.5 U5.5@3937.92,4035 ; C8.1 3960,4296.5 3905,4241.5 3905,4063.16 3909.76,4063.16 U5.5@3937.92,4035 ; 2220,1980 2220,2655 ; 2220,2655 2220,2985 ; 2220,2985 2220,3280 ; 2220,3280 2220,3617.04 ; 3905,3485 3905,4002.08 U5.5@3937.92,4035 ; 3905,3485 3905,3227.92 U4.5@3937.92,3195
  Bottom Layer w10: v4@3136.85,3891.85 v4(3136.85,3899.09)
  Bottom Layer w15: v4(3030,3785) v4@3136.85,3891.85 ; v4(3455,2875) 3457.5,2872.5 3897.5,2872.5 v4(3900,2870)
"Vref 1.2V": R16.1 R35.1 U9.1 | length 2077.1
  Top Layer w15: U9.1 4187.4,1507.6 R35.1 v4(4190,1905) ; v4(4470,2180) 4905,2180 5055,2330 5195,2330 5203.79,2338.79 5203.79,2367.66 5046.45,2525 R16.1
  Bottom Layer w10: v4(4190,1905) v4@4195,1905
  Bottom Layer w15: v4@4195,1905 v4(4470,2180)
X1: C27.2 U6.5 Y1.2 | length 805.4
  Top Layer w10: Y1.2@3115,2545 3110,2550 3110,2670 3133.46,2693.46 C27.2 3125.72,2752.74 3125.72,2947.74 3190.27,3012.29 U6.5
X2: C28.2 U6.6 Y1.1 | length 807.2
  Top Layer w10: U6.6 3209.95,3013.28 3267.6,2955.63 3267.6,2758.94 C28.2 3281.54,2703.46 3315,2670 Y1.1@3315,2545
pads on no net: U6.2 U6.3 U6.4 U6.10 U6.11 U6.12 U6.13 U6.14 U6.17 U6.20 U6.27 U6.28 U6.29 U6.30 U6.31 U6.32 U6.33 U6.45 U6.46 U9.3

## Polygon pours and split planes (outlines as drawn)
GND on Bottom Layer "GND_L02_P012" (solid, remove dead copper, pour order 12): 2147.99,4960 6085,4960 6085,1022.99 2147.99,1022.99
NetJ13_1 on Bottom Layer "NETJ13_1_L02_P000" (solid, pour order 0): 5437.87,4152.87 5415,4130 5235,4130 5235,3005 5422.63,3005
GND on Top Layer "GND_L01_P011" (solid, remove dead copper, pour order 11): 2147.99,4960 6085,4960 6085,1022.99 2147.99,1022.99
NetJ13_1 on Top Layer "NETJ13_1_L01_P001" (solid, pour order 1): 5245,4130 5425,4130 5415,4120 5415,3970 5245,3970
NetJ13_1 on Top Layer "NETJ13_1_L01_P002" (solid, pour order 2): 5245,3340 5250,3335 5420,3335 5420,3010 5260.71,3010
no net on Mechanical 1 "NONET_L-01_P-001" (solid, remove dead copper): 2147.99,4960 6085,4960 6085,1022.99 2147.99,1022.99
GND on Mechanical 1 "NONET_L-01_P-001" (solid, remove dead copper): 2147.99,4960 6085,4960 6085,1022.99 2147.99,1022.99

## Silkscreen, mask and mechanical layers (free items; w line width, h text height)
Mechanical 1:
  the board outline again, w10